# Altium PCB BAILEY.PcbDoc (part 7 of 8)
Units mil, origin at the board's own origin, x right, y up, seen from the top; angles counter-clockwise.
Board outline 6100 x 3000 mil, 4 copper layers (Signal Layer 1, Signal Layer 2, Signal Layer 3, Signal Layer 4), stack 59.904 mil thick; 167 components, 96 nets, 718 pads, 2907 vias.
Unrouted connection lines stored in the file: 1.
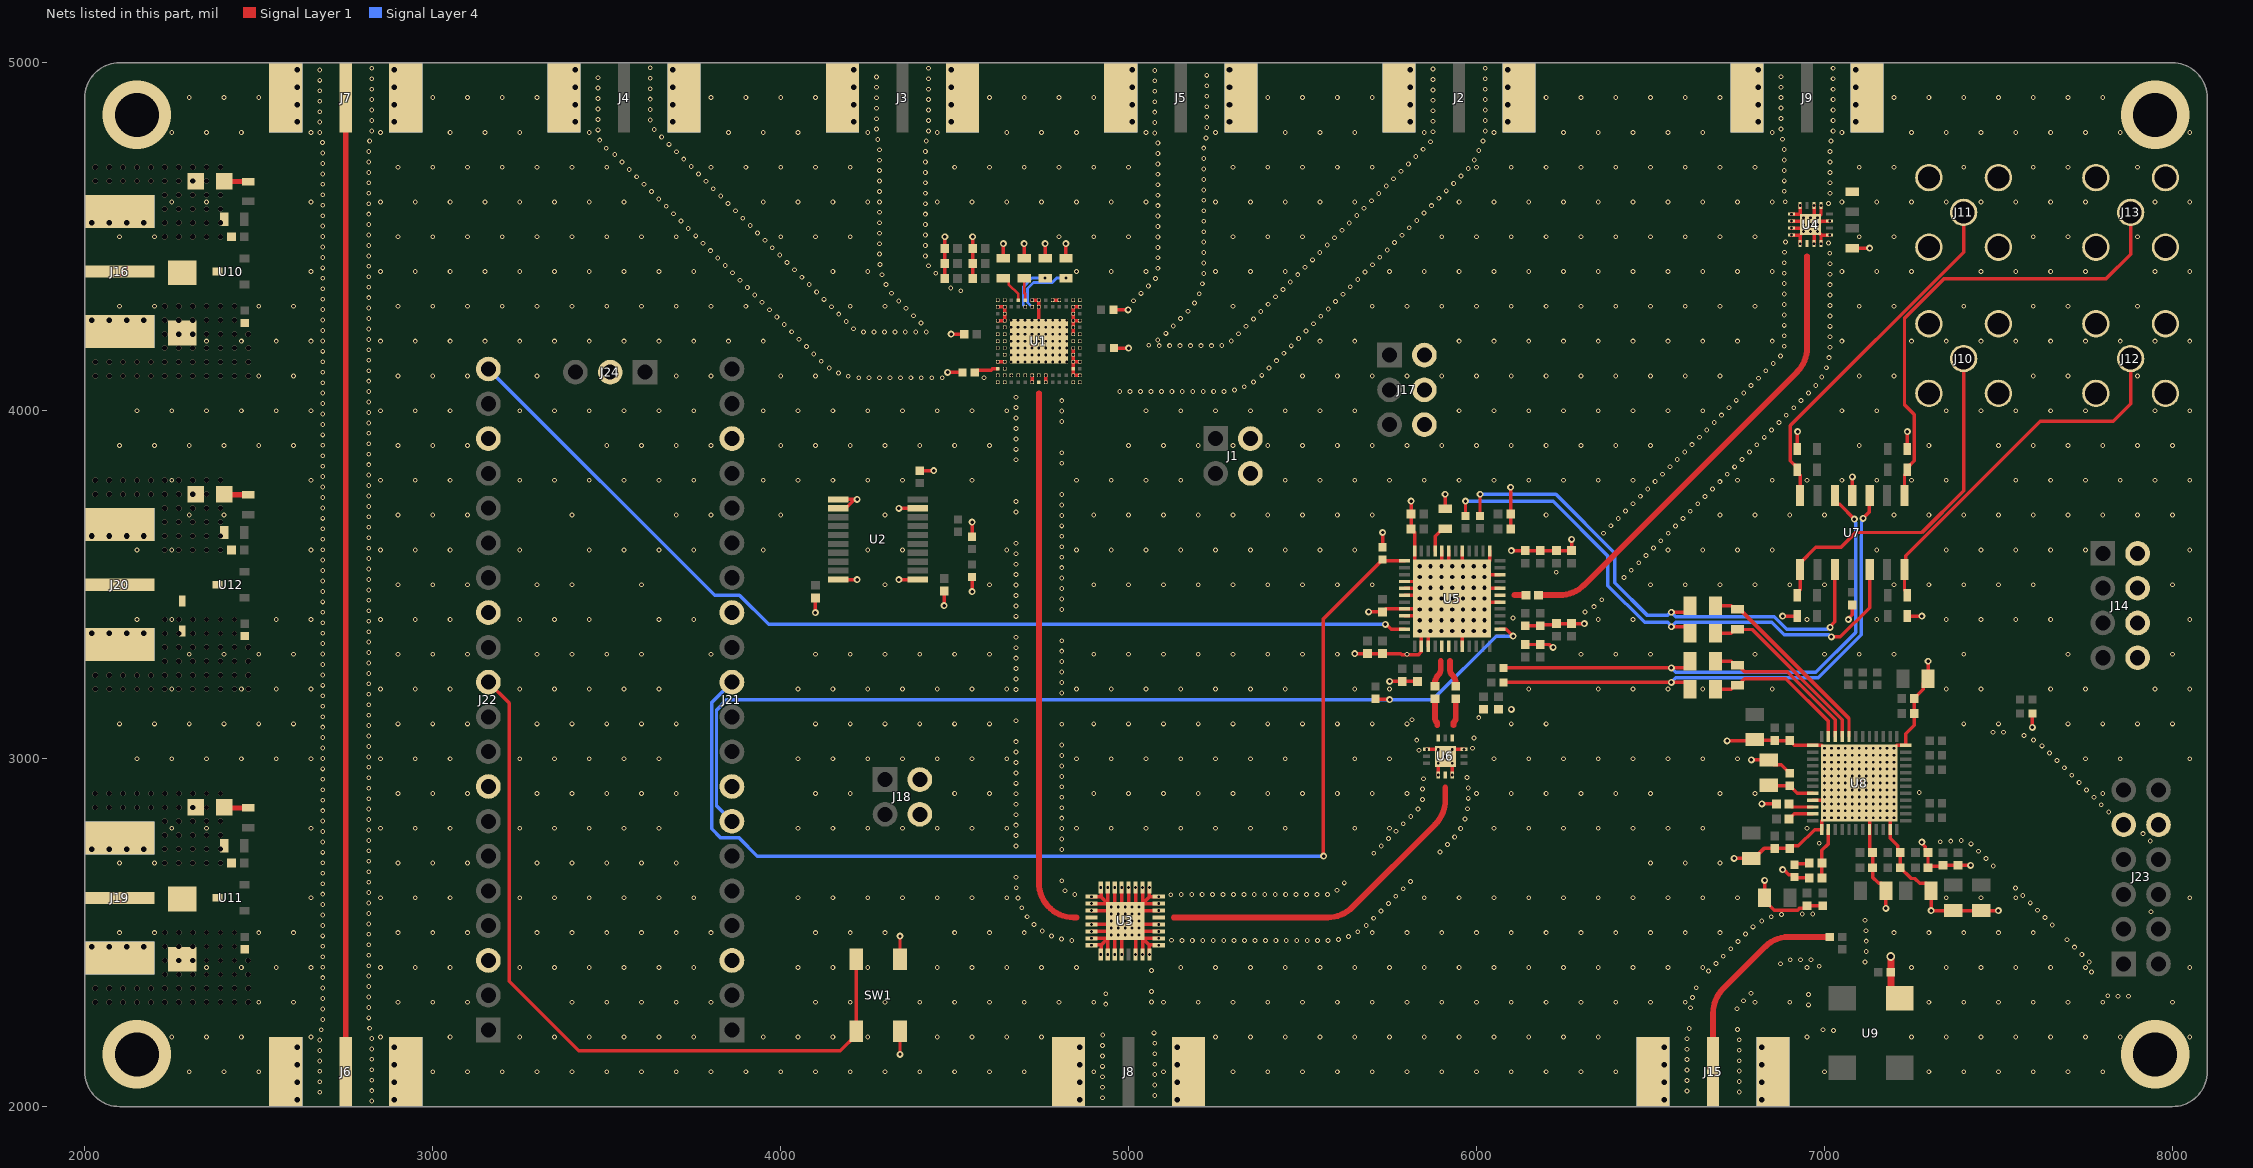
[diagram p5: the nets of this part, all layers, seen from the top]

## Via types
v1: diameter 13.78, hole 7.87, Signal Layer 1 to Signal Layer 4, tented both sides, 1913 vias
v2: diameter 15, hole 15, Signal Layer 1 to Signal Layer 4, 378 vias
v3: diameter 7.87, hole 7.87, Signal Layer 1 to Signal Layer 4, 335 vias
v4: diameter 20, hole 10, Signal Layer 1 to Signal Layer 4, 130 vias
v5: diameter 16, hole 16, Signal Layer 1 to Signal Layer 4, 96 vias
v6: diameter 12, hole 12, Signal Layer 1 to Signal Layer 4, 49 vias
v7: diameter 196.85, hole 125.98, Signal Layer 1 to Signal Layer 4, 4 vias
v8: diameter 25, hole 15, Signal Layer 1 to Signal Layer 4, 2 vias

## Nets (pads, with @x,y where several pads share a name; then routed paths per layer and width w, separated by ;. In a path a pad name is that pad's centre, name@x,y a point inside that pad or via, vN(x,y) a via of type N, cw(c..) or ccw(c..) an arc to the next point about the centre after c; other vN are vias at no path point) (continued)
GND: C1.1 C2.1 C3.1 C4.1 C5.2 C6.1 C7.2 C8.2 C9.1 C10.2 C11.1 C12.2 C13.1 C14.1 C15.1 C16.2 C18.1 C19.2 C20.1 C21.1 C22.2 C25.1 C26.1 C27.2 C28.1 C29.2 C30.1 C31.2 C32.1 C33.2 C34.1 C35.2 C36.1 C37.2 C38.1 C39.2 C40.1 C41.1 C42.1 C43.1 C44.1 C45.1 C46.1 C47.1 C48.1 C49.1 C50.1 C52.1 C53.1 C54.1 C55.1 C56.1 C57.1 C58.1 C59.1 C60.1 C61.1 C62.1 C63.1 C64.1 C65.1 C66.1 C68.1 C69.1 C70.1 C77.1 C78.1 C79.1 C80.1 C81.1 C82.1 C83.1 D1.2 D2.2 D3.1 D4.1 D5.1 D6.2 J1.3 J1.4 J2.2 J3.2 J4.2 J5.2 J6.2 J7.2 J8.2 J9.2 J10.2 J11.2 J12.2 J13.2 J14.5 J14.6 J14.7 J14.8 J15.2 J16.2 J17.4 J17.5 J17.6 J18.3 J18.4 J19.2 J20.2 J21.3 J21.8 J21.13 J21.18 J22.3 J22.8 J22.13 J22.18 J23.5 J23.11 J24.2 R1.1 R2.1 R3.1 R4.1 R5.1 R6.1 R8.2 R9.2 R17.2 R18.2 R19.2 R20.2 R31.2 R33.1 R36.1 R37.1 R41.1 SW1.3 SW1.4 U1.89 U1.A1 U1.A2 U1.A6 U1.A8 U1.A12 U1.A13 U1.B1 U1.B2 U1.B6 U1.B7 U1.B8 U1.B9 U1.B10 U1.B11 U1.B12 U1.B13 U1.C2 U1.C12 U1.D1 U1.D2 U1.D12 U1.D13 U1.E2 U1.E12 U1.F1 U1.F2 U1.F12 U1.F13 U1.G1 U1.G2 U1.G12 U1.G13 U1.H1 U1.H2 U1.H12 U1.H13 U1.J2 U1.J12 U1.K1 U1.K2 U1.K12 U1.K13 U1.L2 U1.L12 U1.M1 U1.M2 U1.M7 U1.M12 U1.M13 U1.N1 U1.N2 U1.N4 U1.N5 U1.N7 U1.N8 U1.N12 U1.N13 U2.1 U2.9 U2.11 U2.12 U2.20 U3.1 U3.2 U3.3 U3.4 U3.5 U3.6 U3.7 U3.8 U3.9 U3.10 U3.11 U3.13 U3.14 U3.15 U3.16 U3.17 U3.18 U3.19 U3.20 U3.22 U3.23 U3.24 U3.25 U3.26 U3.27 U3.28 U3.30 U3.31 U3.32 U3.33 U4.1 U4.2 U4.4 U4.5 U4.6 U4.7 U4.8 U4.9 U4.11 U4.12 U4.13 U4.15 U4.17 U5.4 U5.5 U5.6 U5.8 U5.9 U5.14 U5.15 U5.20 U5.30 U5.32 U5.34 U5.37 U5.41 U5.43 U5.44 U5.48 U5.49 U6.1 U6.3 U6.6 U6.10 U6.13 U7.11 U8.1 U8.9 U8.13 U8.20 U8.23 U8.36 U8.49 U9.2 | length 9684.2
  Signal Layer 1 w10: v4(4100,3420) C12.2@4100,3461.89 ; U2.20@4165.83,3514.84 v4(4220,3514.84) ; U2.12@4165.83,3719.57 4186.5,3719.57 4210.17,3743.24 4218.09,3743.24 v4(4220,3745.16) ; U2.11@4165.83,3745.16 v4@4210.17,3745.16 ; v4(4340,3514.84) U2.1@4394.17,3514.84 ; v4(4340,3719.57) U2.9@4394.17,3719.57 ; v4(4342.99,2150) SW1.4@4342.99,2216.65 ; SW1.3@4342.99,2423.35 v4(4342.99,2490) ; R8.2@4400,3827.72 v4(4440,3827.72) ; v4(4470,3440) C11.1@4470,3481.89 ; C10.2@4471.89,4380 v4(4471.89,4500) ; v4(4480,4110) R1.1@4522.28,4110 ; v4(4490,4220) R4.1@4527.87,4220 ; v4(4550,3480) R5.1@4550,3522.28 ; R6.1@4550,3637.72 v4(4550,3680) ; C7.2@4551.89,4380 v4(4551.89,4500) ; v3(4624.02,4140.94) v3(4643.7,4140.94) ; v3(4624.02,4259.06) v3(4643.7,4259.06) v3(4643.7,4278.74) v3(4643.7,4298.43) v3(4624.02,4298.43) ; C1.1@4640,4438.74 v4(4640,4480) ; C2.1@4700,4438.74 v4(4700,4480) ; v3(4722.44,4081.89) v3(4722.44,4101.57) ; v3(4722.44,4318.11) v3(4742.13,4318.11) v3(4742.13,4298.43) v3(4742.13,4260) ; C3.1@4760,4438.74 v4(4760,4480) ; v3(4761.81,4081.89) v3(4761.81,4101.57) ; v3(4781.5,4318.11) v3(4801.18,4318.11) ; C4.1@4820,4438.74 v4(4820,4480) ; v3(4840.55,4180.31) v3(4840.55,4160.63) v3(4840.55,4140.94) ; v3(4840.55,4219.69) v3(4840.55,4239.37) v3(4840.55,4259.06) ; v3(4860.24,4101.57) v3(4840.55,4101.57) U1.C2@4840.55,4121.26 v3(4840.55,4140.94) ; v3(4860.24,4140.94) v3(4840.55,4140.94) ; v3(4860.24,4259.06) v3(4840.55,4259.06) ; v3(4860.24,4298.43) v3(4840.55,4298.43) v3(4840.55,4278.74) v3(4840.55,4259.06) ; v3(4893.5,2463.5) 4894.5,2464.5 4921,2464.5 ; v3(4893.5,2483.5) U3.33@4940,2483.5 ; v3(4893.5,2503.5) U3.33@4959.99,2503.5 ; v3(4893.5,2523.5) U3.33@4979.99,2523.5 ; v3(4893.5,2563.5) 4960,2563.5 v3(4960,2630) ; v3(4893.5,2583.5) U3.33@4940,2583.5 ; v3(4893.5,2603.5) 4894.5,2602.5 4921,2602.5 ; v3(4920,2437) 4921,2438 4921,2464.5 ; v3(4920,2630) 4921,2629 4921,2602.5 ; v3(4940,2437) U3.33@4940,2483.5 ; v3(4940,2630) U3.33@4940,2583.5 ; R2.1@4956.38,4290 v4(4998.66,4290) ; R3.1@4957.72,4180 v4(5000,4180) ; v3(4960,2437) U3.33@4960,2503.51 ; v3(4980,2437) U3.33@4980,2523.51 ; v3(4980,2630) 4980,2543.5 v3(4990,2533.5) U3.33@4980,2523.51 ; U3.33@5000,2523.5 v3(5086.5,2523.5) ; U3.33@5000,2543.51 v3(5000,2630) ; v3(5020,2437) 5020,2503.5 v3(5086.5,2503.5) ; v3(5020,2630) 5020,2563.51 v3(5086.5,2563.5) ; v3(5040,2437) U3.33@5040,2483.5 ; v3(5040,2630) U3.33@5040,2583.5 ; v3(5060,2437) 5059,2438 5059,2464.5 ; v3(5060,2630) 5059,2629 5059,2602.5 ; v3(5086.5,2463.5) 5085.5,2464.5 5059,2464.5 ; v3(5086.5,2483.5) U3.33@5040,2483.5 ; v3(5086.5,2583.5) U3.33@5040,2583.5 ; v3(5086.5,2603.5) 5085.5,2602.5 5059,2602.5 ; v4(5650,3301.89) C19.2@5686.8,3301.89 C18.1@5730,3301.89 5782.08,3301.89 5785.97,3298 5832.42,3298 5841.42,3307 U5.14@5841.42,3323 U5.49@5841.42,3367 ; v4(5690,3421.89) C20.1@5730,3421.89 5738.58,3430.47 U5.8@5793,3430.47 U5.49@5837,3430.47 ; R9.2@5730,3607.72 v4(5730,3650) ; v4(5750,3221.89) C29.2@5786.8,3221.89 C28.1@5830,3221.89 ; U5.9@5793,3410.79 U5.49@5880.79,3410.79 ; U5.6@5793,3469.84 5920.16,3469.84 U5.43@5920.16,3597 ; U5.5@5793,3489.53 U5.49@5837,3489.53 ; U5.4@5793,3509.21 U5.49@5880.79,3509.21 ; v4(5811.89,3740) C31.2@5811.89,3703.2 C30.1@5811.89,3660 5821.73,3650.16 U5.48@5821.73,3597 5821.73,3568.27 v6(5837,3553) ; v3(5856.81,3026.5) v3(5890.31,3026.5) v3(5910.31,3006.5) ; U5.15@5861.1,3323 U5.49@5861.1,3391.1 ; v3(5890.31,2953) v3(5890.31,2986.5) ; U5.49@5900.47,3553 U5.44@5900.47,3597 ; C25.1@5910,3718.74 v4(5910,3760) ; v6(5930,3460) 6038.27,3568.27 U5.37@6038.27,3597 ; v3(5930.31,2953) v3(5930.31,2986.5) ; v3(5930.31,3026.5) v3(5963.81,3026.5) ; U5.49@5939.84,3450.16 U5.30@6067,3450.16 ; U5.20@5959.53,3323 U5.49@5959.53,3367 ; U5.49@5959.53,3553 U5.41@5959.53,3597 ; U5.49@5998.9,3528.9 U5.34@6067,3528.9 ; U5.49@6023,3489.53 U5.32@6067,3489.53 ; C36.1@6098.11,3660 C37.2@6098.11,3703.2 v4(6098.11,3780.03) ; v4(6100,3598.11) C21.1@6140,3598.11 C22.2@6183.2,3598.11 C34.1@6230,3598.11 C35.2@6273.2,3598.11 v4(6273.2,3630) ; C39.2@6140,3328.11 C38.1@6183.2,3328.11 6209.52,3328.11 6217.63,3320 v4(6220,3320) ; C32.1@6140,3381.89 C33.2@6183.2,3381.89 6186.31,3385 6226.89,3385 C26.1@6230,3388.11 C27.2@6273.2,3388.11 v4(6310,3388.11) ; v4(6720,3051) 6800.43,3051 6801.85,3052.42 C42.1@6856.8,3052.42 6857.07,3052.16 6899.73,3052.16 C43.1@6900,3051.89 6913.62,3038.27 U8.1@6966.24,3038.27 6966.34,3038.17 6991.83,3038.17 v3(7000,3030) ; v4(6740,2713.58) C44.1@6790,2713.58 6797.87,2713.58 6826.18,2741.89 C45.1@6856.8,2741.89 C46.1@6900,2741.89 6907.6,2749.49 6924.88,2749.49 6971.64,2796.24 U8.13@6991.73,2796.24 6991.83,2796.34 6991.83,2821.83 v3(7000,2830) ; v4(6790,2996.42) C59.1@6840,2996.42 6853.7,2982.72 6875.39,2982.72 C61.1@6900,2958.11 ; v4(6820,2870) C50.1@6861.89,2870 ; v4(6827.87,2650) C66.1@6827.87,2600.32 6827.87,2592.45 6855.57,2564.75 6923.13,2564.75 6928.17,2569.79 6942.4,2569.79 C68.1@6950,2577.39 C69.1@6995.08,2577.39 ; v4(6879.8,2681.38) 6882.5,2681.38 6897.15,2666.73 6907.16,2666.73 R33.1@6913.97,2659.92 6915.53,2658.36 6954.82,2658.36 C70.1@6956.38,2656.8 ; v4(6880,3410) R17.2@6921.46,3410 ; v3(6905,4505) U4.17@6930,4505 ; v3(6905,4525) 6950,4525 v3(6960,4535) ; v3(6905,4545) U4.17@6950,4545 ; v3(6905,4565) U4.17@6930,4565 ; R18.2@6921.46,3890 6922.23,3890.77 6922.23,3939.23 v4(6923,3940) ; v3(6930,4480) U4.17@6930,4505 ; v3(6930,4590) U4.17@6930,4565 ; v3(6940,4515) U4.17@6930,4505 ; v3(6940,4555) U4.17@6930,4565 ; U8.9@6966.24,2880.79 7050.79,2880.79 v3(7060,2890) v3(7080,2910) v3(7100,2930) ; v3(6970,4480) 6970,4525 v3(6960,4535) ; v3(6970,4590) 6970,4545 v3(6960,4535) ; v3(6980,4515) U4.17@6990,4505 ; U4.17@6980,4540 6986.21,4540 6990.71,4544.5 7014.5,4544.5 v3(7015,4545) ; v3(6980,4555) 6990,4565 v3(6990,4590) ; v3(6990,4480) U4.17@6990,4505 ; v3(7015,4505) U4.17@6990,4505 ; v4(7068.91,3400) 7068.91,3402.71 7080,3413.8 C40.1@7080,3441.89 ; U7.11@7080,3756.3 v4(7080,3810) ; C14.1@7080,4467.52 v4(7130,4467.52) ; U8.49@7129.53,2900.47 U8.20@7129.53,2796.24 7129.53,2738.58 C49.1@7138.11,2730 C48.1@7138.11,2686.8 7138.11,2659.2 7155.74,2641.57 7162.72,2641.57 7176.42,2627.87 C47.1@7176.42,2620 v4(7176.42,2570) ; v3(7180,2850) 7188.58,2841.42 7188.58,2771.42 7210.51,2749.49 7210.51,2737.6 C54.1@7218.11,2730 C53.1@7218.11,2686.8 ; v3(7200,3030) 7208.17,3038.17 7233.66,3038.17 U8.36@7233.76,3038.27 7233.76,3072 7258.11,3096.36 C65.1@7258.11,3130 C64.1@7258.11,3173.2 7284.33,3199.42 7284.33,3216.67 C63.1@7298.03,3230.37 v4(7298.03,3280) ; C53.1@7218.35,2686.57 7249.34,2655.57 7260.02,2655.57 7274.02,2641.57 7292.72,2641.57 C52.1@7306.42,2627.87 ; R19.2@7238.54,3410 v4(7280,3410) ; R20.2@7238.54,3890 v4(7238.54,3940) ; v4(7280,2760) 7280,2757.29 7289.93,2747.37 7289.93,2737.6 C57.1@7297.53,2730 C56.1@7297.53,2686.8 7300.91,2690.18 7337.34,2690.18 C62.1@7340.72,2693.56 C60.1@7383.92,2693.56 v4(7420,2693.56) ; C52.1@7306.42,2620 7310.35,2620 7306.42,2616.06 v4(7306.42,2563.58) C55.1@7370,2563.58 C58.1@7450,2563.58 v4(7500,2563.58) ; v4(7597.72,3089.94) R31.2@7597.72,3130 ; 4921,2464.5 U3.33@4940,2483.5 ; 4921,2602.5 U3.33@4940,2583.5 ; U3.33@4940,2483.51 v3(4950,2493.5) U3.33@4959.99,2503.5 ; U3.33@4960,2503.51 v3(4970,2513.5) U3.33@4979.99,2523.5 ; U3.33@5040,2483.5 5059,2464.5 ; U3.33@5040,2583.5 5059,2602.5
  Signal Layer 1 w20: v8(7190.62,2431.42) C77.1@7190.62,2386.09 7190.62,2336.86 U9.2@7216.14,2311.42 U9.2@7216.14,2311.42
  other v1: 2824.88,2015.86 4925.12,2025.65 5074.88,2031.95 2675.12,2041.36 6754.88,2042.01 6605.12,2045.13 2824.88,2045.86 4925.12,2055.65 5074.88,2061.95 2675.12,2071.36 6754.88,2072.01 6605.12,2075.13 2824.88,2075.86 4925.12,2085.65 5074.88,2091.95 2300,2100 2400,2100 2500,2100 3000,2100 3100,2100 3200,2100 3300,2100 3400,2100 3500,2100 3600,2100 3700,2100 3800,2100 3900,2100 4000,2100 4100,2100 4200,2100 4300,2100 4400,2100 4500,2100 4600,2100 4700,2100 4900,2100 5100,2100 5300,2100 5400,2100 5500,2100 5600,2100 5700,2100 5800,2100 5900,2100 6000,2100 6100,2100 6200,2100 6300,2100 6400,2100 7000,2100 7300,2100 7400,2100 7500,2100 7600,2100 7700,2100 7800,2100 2675.12,2101.36 6754.88,2102.01 6605.12,2105.13 2824.88,2105.86 4925.12,2115.65 5074.88,2121.95 2675.12,2131.36 6754.88,2132.01 6605.12,2135.13 2824.88,2135.86 4925.12,2145.65 5074.88,2151.95 2675.12,2161.36 6754.88,2162.01 6605.12,2165.13 2824.88,2165.86 4925.12,2175.65 5074.88,2181.95 2675.12,2191.36 6754.88,2192.01 6605.12,2195.13 2824.88,2195.86 2250,2200 2350,2200 2450,2200 2650,2200 2850,2200 3050,2200 3250,2200 3350,2200 3450,2200 3550,2200 3650,2200 3750,2200 3950,2200 4050,2200 4150,2200 4250,2200 4450,2200 4550,2200 4650,2200 4750,2200 5250,2200 5350,2200 5450,2200 5550,2200 5650,2200 5750,2200 5850,2200 5950,2200 6050,2200 6150,2200 6250,2200 6350,2200 6950,2200 7250,2200 7350,2200 7450,2200 7550,2200 7650,2200 7750,2200 7850,2200 8050,2200 4925.86,2205.64 5073.31,2211.91 7025.94,2218.61 2679.63,2221.02 6996.02,2220.79 6750.12,2221.63 2818.64,2225.2 6611.08,2224.53 2684.13,2250.68 2815.87,2255.08 2684.13,2280.68 6748.52,2281.21 6615.02,2284.36 2815.87,2285.08 6954.04,2292.41 4934.13,2294.47 2500,2300 2600,2300 2900,2300 3000,2300 3100,2300 3400,2300 3500,2300 3600,2300 3700,2300 3800,2300 4100,2300 4200,2300 4300,2300 4400,2300 4500,2300 4600,2300 4700,2300 4800,2300 4900,2300 5100,2300 5200,2300 5300,2300 5400,2300 5500,2300 5600,2300 5700,2300 5800,2300 5900,2300 6000,2300 6100,2300 6200,2300 6300,2300 6400,2300 6500,2300 6600,2300 6800,2300 6900,2300 7300,2300 7400,2300 7500,2300 7600,2300 7700,2300 7800,2300 8000,2300 5065.87,2300.97 6767.55,2304.4 2684.13,2310.68 6620.46,2313.86 2815.87,2315.07 7843.9,2317.19 7873.9,2317.19 7813.93,2318.59 6954.04,2322.41 4934.13,2324.47 6788.76,2325.61 5065.87,2330.97 2684.13,2340.68 6631.3,2341.83 2815.87,2345.07 2684.13,2370.68 2815.87,2375.07 7767.19,2386.55 6666.79,2389.94 5065.87,2390.97 2350,2400 2450,2400 2550,2400 2650,2400 2850,2400 2950,2400 3050,2400 3250,2400 3350,2400 3450,2400 3550,2400 3650,2400 3750,2400 4050,2400 4150,2400 4250,2400 4450,2400 4550,2400 4650,2400 4750,2400 4850,2400 5150,2400 5250,2400 5350,2400 5450,2400 5550,2400 5650,2400 5750,2400 5850,2400 5950,2400 6050,2400 6150,2400 6250,2400 6350,2400 6450,2400 6550,2400 6650,2400 6950,2400 7250,2400 7350,2400 7450,2400 7550,2400 7650,2400 7750,2400 8050,2400 2684.13,2400.68 6984.92,2403.27 2815.87,2405.07 6873.61,2410.46 6688,2411.15 7116.66,2415.78 7760.95,2415.89 6901.37,2421.85 6931.37,2421.85 6961.37,2421.85 2684.13,2430.68 6709.21,2432.36 2815.87,2435.07 7739.74,2437.11 7119.98,2445.59 6730.43,2453.58 7718.53,2458.32 2684.13,2460.68 2815.87,2465.07 6751.64,2474.79 7119.94,2475.59 4836.56,2477.72 5123.23,2478.17 5153.23,2477.63 5183.22,2477.63 5213.22,2477.63 5243.22,2477.63 5273.22,2477.63 5303.22,2477.63 5333.22,2477.63 5363.22,2477.63 5393.22,2477.63 5423.22,2477.63 5453.22,2477.63 5483.22,2477.63 5513.22,2477.63 5543.22,2477.63 5573.22,2477.61 7697.31,2479.53 5603.08,2480.53 4806.81,2481.56 5631.88,2488.91 2684.13,2490.68 4778.21,2490.62 2815.87,2495.07 6772.85,2496 2100,2500 2200,2500 2500,2500 2600,2500 2900,2500 3000,2500 3100,2500 3300,2500 3400,2500 3500,2500 3600,2500 3700,2500 3800,2500 4100,2500 4200,2500 4300,2500 4500,2500 4600,2500 4700,2500 5700,2500 5800,2500 5900,2500 6000,2500 6100,2500 6200,2500 6300,2500 6400,2500 6500,2500 6600,2500 6700,2500 7200,2500 7300,2500 7400,2500 7500,2500 7600,2500 5658.74,2502.26 4751.66,2504.59 7119.18,2505.58 6794.67,2516.59 5682.82,2520.16 2684.13,2520.68 7654.89,2521.96 4728.01,2523.05 2815.87,2525.07 6819.46,2533.49 7116.66,2535.47 5704.28,2541.13 7633.68,2543.17 6846.96,2545.48 4708.39,2545.74 2684.13,2550.67 6876.2,2552.16 6936.17,2553.59 6966.17,2553.59 2815.87,2555.07 7938.2,2560.19 5725.49,2562.34 7612.46,2564.38 4692.79,2571.36 2684.13,2580.67 5746.7,2583.55 2815.87,2585.07 7591.25,2585.6 4682.28,2599.46 2650,2600 2850,2600 2950,2600 3050,2600 3250,2600 3350,2600 3450,2600 3550,2600 3650,2600 3750,2600 4050,2600 4150,2600 4250,2600 4350,2600 4450,2600 4550,2600 4650,2600 5850,2600 5950,2600 6050,2600 6150,2600 6250,2600 6350,2600 6450,2600 6550,2600 6650,2600 6750,2600 7350,2600 7450,2600 7550,2600 8050,2600 5767.92,2604.76 7570.04,2606.81 4845.1,2609.37 5121.36,2608.66 5151.35,2609.37 5181.35,2609.37 5211.35,2609.37 5241.35,2609.37 5271.35,2609.37 5301.35,2609.37 5331.35,2609.37 5361.35,2609.37 5391.35,2609.37 5421.35,2609.37 5451.35,2609.37 5481.35,2609.37 5511.35,2609.37 5541.35,2609.37 5571.35,2609.47 2684.13,2610.67 2815.87,2615.07 4817.25,2620.54 5598.68,2621.83 5789.13,2625.98 7548.82,2628.02 4677.05,2629 2684.13,2640.67 5619.89,2643.04 2815.87,2645.07 5810.34,2647.19 4807.99,2649.07 4676.26,2658.99 2684.13,2670.67 2815.87,2675.07 7485.19,2691.66 2100,2700 2200,2700 2900,2700 3000,2700 3100,2700 3300,2700 3400,2700 3500,2700 3600,2700 3700,2700 6500,2700 6600,2700 6700,2700 2684.13,2700.67 2815.87,2705.07 7463.97,2712.87 5704.74,2727.9 2684.13,2730.67 5895.19,2732.04 7442.76,2734.09 2815.87,2735.07 4807.99,2739.07 4676.26,2748.99 5725.96,2749.11 5916.41,2753.26 7421.36,2755.11 6985.1,2757 2684.13,2760.67 7332.98,2761.26 7362.93,2763.02 7936.26,2763.08 2815.87,2765.07 7392.89,2764.58 4807.99,2769.07 5747.17,2770.32 5937.07,2775 4676.26,2778.99 7915.3,2784.55 2684.13,2790.67 5768.38,2791.53 2815.87,2795.07 4807.99,2799.07 2250,2800 2350,2800 2650,2800 2850,2800 2950,2800 3050,2800 3250,2800 3350,2800 3450,2800 3550,2800 3650,2800 4050,2800 4150,2800 4250,2800 4350,2800 4450,2800 4550,2800 4650,2800 4850,2800 4950,2800 5050,2800 5150,2800 5250,2800 5350,2800 5450,2800 5650,2800 5750,2800 5954.3,2799.56 6050,2800 6150,2800 6250,2800 6350,2800 6450,2800 6550,2800 6650,2800 6950,2800 4676.26,2808.99 5789.59,2812.75 2684.13,2820.67 2815.87,2825.07 5966.83,2826.82 4807.99,2829.07 5810.81,2833.96 4676.26,2838.99 7816.74,2846.41 2684.13,2850.67 2815.87,2855.07 5832.02,2855.17 5973.93,2855.96 4807.99,2859.07 7795.52,2867.63 4676.26,2868.99 2684.13,2880.67 5844.35,2882.52 2815.87,2885.07 5976.18,2885.88 4807.99,2889.07 7774.31,2888.84 4676.26,2898.99 2900,2900 3000,2900 3100,2900 3300,2900 3400,2900 3500,2900 3600,2900 3700,2900 4100,2900 4200,2900 4500,2900 4600,2900 4900,2900 5000,2900 5100,2900 5200,2900 5300,2900 5400,2900 5500,2900 5600,2900 5700,2900 5800,2900 6000,2900 6100,2900 6200,2900 6300,2900 6400,2900 6500,2900 6700,2900 6800,2900 7800,2900 7272.19,2902.86 7753.1,2910.05 2684.13,2910.67 5844.45,2912.52 2815.87,2915.06 5976.18,2915.88 4807.99,2919.07 4676.26,2928.99 7731.89,2931.27 2684.13,2940.67 5847.39,2942.38 2815.87,2945.06 5972.82,2945.69 4807.99,2949.07 7710.67,2952.48 4676.26,2958.99 2684.13,2970.67 7689.46,2973.69 2815.87,2975.06 4807.99,2979.07 4676.26,2988.99 7668.25,2994.9 2150,3000 2250,3000 2350,3000 2450,3000 2550,3000 2650,3000 2850,3000 2950,3000 3050,3000 3250,3000 3350,3000 3450,3000 3550,3000 3650,3000 4050,3000 4150,3000 4250,3000 4350,3000 4450,3000 4550,3000 4650,3000 4850,3000 4950,3000 5050,3000 5150,3000 5250,3000 5350,3000 5450,3000 5650,3000 5750,3000 6050,3000 6150,3000 6250,3000 6350,3000 6450,3000 6550,3000 6650,3000 6750,3000 7750,3000 7850,3000 8050,3000 2684.13,3000.67 2815.87,3005.06 4807.99,3009.07 7647.03,3016.12 4676.26,3018.99 5834.5,3024.02 5988.57,3029.91 2684.13,3030.67 2815.87,3035.06 7625.28,3036.77 4807.99,3039.07 4676.26,3048.99 5827.93,3053.3 7600.7,3053.97 5992.7,3059.63 2684.13,3060.67 2815.87,3065.06 7573.41,3066.44 7484.35,3075.74 7514.35,3075.74 2684.13,3090.67 2815.87,3095.06 4807.99,3099.06 2100,3100 2200,3100 2300,3100 2400,3100 2500,3100 2600,3100 2900,3100 3000,3100 3100,3100 3300,3100 3400,3100 3500,3100 3600,3100 3700,3100 4100,3100 4200,3100 4300,3100 4400,3100 4500,3100 4600,3100 4900,3100 5000,3100 5100,3100 5200,3100 5300,3100 5400,3100 5500,3100 5600,3100 5700,3100 5800,3100 6100,3100 6200,3100 7400,3100 7500,3100 7700,3100 7800,3100 7900,3100 8000,3100 4676.26,3108.98 5814.82,3111.84 6006.41,3117.94 2684.13,3120.67 2815.87,3125.06 2684.13,3150.66 2815.87,3155.06 2684.13,3180.66 2815.87,3185.06 4807.99,3189.06 4676.26,3198.98 2250,3200 2450,3200 2550,3200 2650,3200 2850,3200 2950,3200 3050,3200 3250,3200 3350,3200 3450,3200 3550,3200 3650,3200 4050,3200 4150,3200 4250,3200 4350,3200 4450,3200 4550,3200 4650,3200 4850,3200 4950,3200 5050,3200 5150,3200 5250,3200 5350,3200 5450,3200 5650,3200 5750,3200 6150,3200 6350,3200 6450,3200 6550,3200 6650,3200 6850,3200 7350,3200 7450,3200 7650,3200 7750,3200 7950,3200 8050,3200 2684.13,3210.66 2815.87,3215.06 4807.99,3219.06 4676.26,3228.98 2684.13,3240.66 2815.87,3245.06 4807.99,3249.06 4676.26,3258.98 2684.13,3270.66 2815.87,3275.06 4807.99,3279.06 4676.26,3288.98 2300,3300 2400,3300 2500,3300 2600,3300 2900,3300 3000,3300 3100,3300 3300,3300 3400,3300 3500,3300 3600,3300 3800,3300 4100,3300 4200,3300 4300,3300 4400,3300 4500,3300 4600,3300 4900,3300 5000,3300 5100,3300 5200,3300 5300,3300 5400,3300 5500,3300 5600,3300 5800,3300 6300,3300 6400,3300 6500,3300 6800,3300 7000,3300 7100,3300 7200,3300 7400,3300 7700,3300 8000,3300 2684.13,3300.66 2815.87,3305.06 4807.99,3309.06 4676.26,3318.98 2684.13,3330.66 2815.87,3335.06 4807.99,3339.06 4676.26,3348.98 2684.13,3360.66 2815.87,3365.06 2684.13,3390.66 2815.87,3395.06 2150,3400 2250,3400 2550,3400 2650,3400 2850,3400 2950,3400 3050,3400 3250,3400 3350,3400 3450,3400 3650,3400 3750,3400 6350,3400 6450,3400 6950,3400 7150,3400 7350,3400 7450,3400 7550,3400 7650,3400 8050,3400 6104.89,3404.17 4676.26,3408.98 2684.13,3420.66 6311.84,3421.31 2815.87,3425.06 4807.99,3429.06 6337.42,3436.97 4676.26,3438.98 2684.13,3450.66 2815.87,3455.06 6359.94,3456.79 4807.99,3459.06 4676.26,3468.98 2684.13,3480.66 2815.87,3485.06 4807.99,3489.06 4676.26,3498.98 2900,3500 3000,3500 3100,3500 3300,3500 3400,3500 3600,3500 4300,3500 4600,3500 4900,3500 5000,3500 5100,3500 5200,3500 5300,3500 5400,3500 5500,3500 5600,3500 5700,3500 6500,3500 6600,3500 6700,3500 6800,3500 6900,3500 7000,3500 7200,3500 7300,3500 7400,3500 7500,3500 7600,3500 8000,3500 2684.13,3510.66 2815.87,3515.05 4807.99,3519.06 6423.58,3520.43 4676.26,3528.98 6228.98,3535.87 2684.13,3540.66 6444.8,3541.64 2815.87,3545.05 4807.99,3549.06 4676.26,3558.98 6466.01,3562.86 2684.13,3570.66 2815.87,3575.05 4807.99,3579.06 6487.22,3584.07 4676.26,3588.98 2150,3600 2250,3600 2650,3600 2850,3600 2950,3600 3050,3600 3250,3600 3450,3600 3550,3600 3650,3600 3750,3600 3950,3600 4250,3600 4350,3600 4650,3600 4850,3600 4950,3600 5050,3600 5150,3600 5250,3600 5350,3600 5450,3600 5550,3600 5650,3600 6550,3600 6650,3600 6750,3600 6850,3600 7150,3600 7350,3600 7450,3600 7550,3600 7650,3600 7750,3600 8050,3600 2684.13,3600.66 2815.87,3605.05 6508.43,3605.28 4807.99,3609.06 4676.26,3618.98 6529.65,3626.49 2684.13,3630.66 2815.87,3635.05 4807.99,3639.05 6364.82,3647.98 6550.86,3647.71 2684.13,3660.66 2815.87,3665.05 4807.99,3669.05 6386.04,3669.19 6572.07,3668.92 6407.25,3690.4 6593.29,3690.13 2684.13,3690.66 2815.87,3695.05 4807.99,3699.05 2300,3700 2400,3700 2900,3700 3000,3700 3100,3700 3400,3700 3700,3700 3800,3700 4000,3700 4300,3700 4900,3700 5000,3700 5100,3700 5200,3700 5300,3700 5400,3700 5500,3700 5600,3700 5700,3700 6200,3700 6700,3700 6800,3700 6900,3700 7000,3700 7200,3700 7300,3700 7400,3700 7500,3700 7600,3700 7700,3700 7800,3700 7900,3700 8000,3700 4676.26,3708.97 6614.5,3711.35 6428.46,3711.61 2684.13,3720.66 2815.87,3725.05 4807.99,3729.05 6449.67,3732.83 6635.71,3732.56 4676.26,3738.97 2684.13,3750.65 6470.89,3754.04 6656.92,3753.77 2815.87,3755.05 4807.99,3759.05 6492.1,3775.25 6678.14,3774.99 2684.13,3780.65 2815.87,3785.05 6513.31,3796.46 6699.35,3796.2 2250,3800 2650,3800 2850,3800 2950,3800 3050,3800 3250,3800 3350,3800 3450,3800 3550,3800 3650,3800 3750,3800 3950,3800 4050,3800 4150,3800 4250,3800 4350,3800 4550,3800 4850,3800 4950,3800 5050,3800 5150,3800 5450,3800 5550,3800 5650,3800 5750,3800 5850,3800 5950,3800 6050,3800 6150,3800 6250,3800 6350,3800 6450,3800 6750,3800 6850,3800 6950,3800 7050,3800 7150,3800 7250,3800 7350,3800 7550,3800 7650,3800 7750,3800 7850,3800 7950,3800 8050,3800 2684.13,3810.65 2815.87,3815.05 6720.56,3817.41 6534.53,3817.68 6555.74,3838.89 6741.78,3838.62 2684.13,3840.65 2815.87,3845.05 4807.99,3849.05 4676.26,3858.97 6576.95,3860.1 6762.99,3859.84 2684.13,3870.65 2815.87,3875.05 4807.99,3879.05 6598.16,3881.32 6784.2,3881.05 4676.26,3888.97 2100,3900 2200,3900 2300,3900 2400,3900 2500,3900 2600,3900 2900,3900 3000,3900 3100,3900 3500,3900 3600,3900 3700,3900 3800,3900 4000,3900 4100,3900 4200,3900 4300,3900 4400,3900 4500,3900 4600,3900 5000,3900 5100,3900 5200,3900 5300,3900 5400,3900 5500,3900 5600,3900 5700,3900 5800,3900 5900,3900 6000,3900 6100,3900 6200,3900 6300,3900 6400,3900 6500,3900 7100,3900 7300,3900 7500,3900 7600,3900 7700,3900 7800,3900 7900,3900 8000,3900 2684.13,3900.65 6805.42,3902.26 6619.38,3902.53 2815.87,3905.05 4676.26,3918.97 6826.63,3923.48 6640.59,3923.74 2684.13,3930.65 2815.87,3935.05 6661.8,3944.95 6847.84,3944.69 4676.26,3948.97 2684.13,3960.65 2815.87,3965.05 6683.01,3966.17 6869.05,3965.9 4807.99,3969.05 4676.26,3978.97 6704.23,3987.38 6890.27,3987.11 2684.13,3990.65 2815.87,3995.05 4807.99,3999.05 2150,4000 2250,4000 2350,4000 2450,4000 2550,4000 2650,4000 2850,4000 2950,4000 3050,4000 3250,4000 3350,4000 3450,4000 3550,4000 3650,4000 3750,4000 3950,4000 4050,4000 4150,4000 4250,4000 4350,4000 4450,4000 4550,4000 4650,4000 5050,4000 5150,4000 5250,4000 5350,4000 5450,4000 5550,4000 5650,4000 5950,4000 6050,4000 6150,4000 6250,4000 6350,4000 6450,4000 6550,4000 6650,4000 7050,4000 7150,4000 7350,4000 7450,4000 7550,4000 7650,4000 7750,4000 7950,4000 8050,4000 6911.48,4008.33 4676.26,4008.97 6725.44,4008.59 2684.13,4020.65 2815.87,4025.05 4807.99,4029.05 6746.65,4029.81 6932.69,4029.54 4676.26,4038.97 2684.13,4050.65 6767.87,4051.02 6953.91,4050.75 2815.87,4055.05 4974.36,4055.39 5004.35,4055.39 5034.35,4055.39 5064.35,4055.39 5094.35,4055.39 5124.35,4055.39 5154.35,4055.39 5184.35,4055.39 5214.35,4055.39 5244.35,4055.39 5274.35,4055.56 5304.08,4059.58 5332.63,4068.79 6789.08,4072.23 6974.75,4072.33 2684.13,4080.65 5359.1,4082.92 2815.87,4085.05 6810.29,4093.44 4224.22,4095.05 4254.22,4094.76 4284.22,4094.76 4314.22,4094.76 4344.22,4094.76 4374.22,4094.76 4404.22,4094.76 4434.22,4094.76 4464.22,4094.76 4584.22,4094.76 6992.37,4096.61 4194.52,4099.28 2500,4100 2600,4100 2900,4100 3000,4100 3100,4100 3300,4100 3700,4100 3800,4100 4000,4100 4100,4100 5500,4100 5600,4100 5700,4100 5800,4100 5900,4100 6000,4100 6100,4100 6200,4100 6300,4100 6400,4100 6500,4100 6600,4100 6700,4100 7100,4100 7200,4100 7600,4100 7700,4100 7900,4100 5382.55,4101.62 4166.04,4108.71 2684.13,4110.65 2815.87,4115.04 6831.5,4114.66 4139.68,4123.03 5403.81,4122.78 7005.42,4123.62 6852.72,4135.87 2684.13,4140.65 4116.45,4142.01 5425.02,4144 2815.87,4145.04 7013.28,4152.57 6873.83,4157.18 4095.18,4163.17 5446.24,4165.21 2684.13,4170.65 2815.87,4175.04 7015.9,4182.46 4073.97,4184.38 6884.13,4185.36 5467.45,4186.42 5087.92,4187.13 5117.92,4187.13 5147.92,4187.13 5177.92,4187.13 5207.92,4187.13 5237.92,4187.13 5267.92,4187.32 5057.95,4188.39 2350,4200 2450,4200 2550,4200 2650,4200 2850,4200 2950,4200 3050,4200 3150,4200 3250,4200 3350,4200 3450,4200 3550,4200 3650,4200 3750,4200 3850,4200 3950,4200 5294.98,4200.26 5550,4200 5650,4200 5950,4200 6050,4200 6150,4200 6250,4200 6350,4200 6450,4200 6550,4200 6650,4200 6750,4200 6850,4200 7050,4200 7250,4200 7350,4200 7450,4200 7550,4200 7650,4200 7750,4200 7850,4200 7950,4200 8050,4200 2684.13,4200.65 5084.06,4203.16 2815.87,4205.04 4052.75,4205.59 5488.66,4207.64 7015.87,4212.46 6884.13,4215.36 5316.2,4221.47 5107.14,4222.33 4238.29,4226.5 4268.29,4226.5 4298.29,4226.5 4328.29,4226.5 4358.29,4226.5 4388.29,4226.5 4418.29,4226.5 4031.54,4226.8 5509.88,4228.85 2684.13,4230.65 2815.87,4235.04 4209.67,4235.48 7015.87,4242.46 5337.41,4242.69 5128.27,4243.62 6884.13,4245.36 4010.33,4248.02 5531.09,4250.06 4403.26,4252.46 4188.21,4256.44 2684.13,4260.65 5358.62,4263.9 2815.87,4265.04 5149.48,4264.83 3989.11,4269.23 5552.3,4271.27 7015.87,4272.46 4381.55,4273.17 6884.13,4275.36 4166.99,4277.65 5379.83,4285.11 5170.67,4286.07 3967.9,4290.44 2684.13,4290.65 5573.51,4292.49 4360.34,4294.38 2815.87,4295.04 4145.78,4298.87 2100,4300 2200,4300 2500,4300 2600,4300 2900,4300 3000,4300 3100,4300 3200,4300 3300,4300 3400,4300 3500,4300 3600,4300 3700,4300 3800,4300 3900,4300 4200,4300 4300,4300 5300,4300 5700,4300 5800,4300 5900,4300 6000,4300 6100,4300 6200,4300 6300,4300 6400,4300 6500,4300 6600,4300 6700,4300 6800,4300 7100,4300 7200,4300 7400,4300 7600,4300 7700,4300 7900,4300 7015.87,4302.46 6884.13,4305.36 5401.05,4306.33 5189.09,4309.75 3946.69,4311.65 5594.73,4313.7 4339.13,4315.6 5014.37,4316.11 4124.57,4320.08 2684.13,4320.65 2815.87,4325.04 5422.26,4327.54 7015.87,4332.46 3925.48,4332.87 5615.94,4334.91 6884.13,4335.36 5203.01,4336.32 5035.63,4337.28 4318.85,4337.7 4103.36,4341.29 4517.57,4344.61 5443.47,4348.75 2684.13,4350.64 4488.74,4352.92 3904.26,4354.08 2815.87,4355.04 5637.15,4356.13 5056.84,4358.5 7015.87,4362.45 4082.14,4362.51 4302.87,4363.1 5212.01,4364.94 6884.13,4365.36 5464.69,4369.96 3883.05,4375.29 5658.37,4377.34 5077.54,4380.21 2684.13,4380.64 4060.93,4383.72 2815.87,4385.04 4291.44,4390.83 5485.9,4391.18 7015.87,4392.45 4446,4395.03 5215.81,4394.7 6884.13,4395.36 3861.84,4396.51 5679.58,4398.55 2650,4400 2850,4400 2950,4400 3050,4400 3150,4400 3250,4400 3350,4400 3450,4400 3550,4400 3650,4400 3750,4400 4150,4400 4250,4400 4850,4400 4950,4400 5050,4400 5250,4400 5350,4400 5450,4400 5750,4400 5850,4400 5950,4400 6050,4400 6150,4400 6250,4400 6350,4400 6450,4400 6550,4400 6650,4400 6750,4400 6850,4400 7050,4400 7150,4400 7250,4400 7450,4400 7550,4400 7650,4400 7750,4400 7950,4400 8050,4400 4039.72,4404.93 5084.13,4409.48 2684.13,4410.64 5507.11,4412.39 2815.87,4415.04 4425.02,4416.47 3840.62,4417.72 4285.24,4420.18 5700.79,4419.77 7015.87,4422.45 5215.87,4424.7 6884.13,4425.35 4018.5,4426.14 5528.32,4433.6 3819.41,4438.93 5084.13,4439.48 2684.13,4440.64 5722,4440.98 2815.87,4445.04 4415.87,4445.04 3997.29,4447.36 4284.13,4450.16 7015.08,4452.44 5215.87,4454.7 5549.54,4454.82 6885.27,4455.33 3798.2,4460.14 5743.22,4462.19 3976.08,4468.57 5084.13,4469.48 2684.13,4470.64 2815.87,4475.04 4415.87,4475.04 5570.75,4476.03 4284.13,4480.16 3776.99,4481.36 7011.88,4482.27 5764.43,4483.4 5215.87,4484.7 6888.12,4485.2 3954.87,4489.78 5591.96,4497.24 5084.13,4499.48 2100,4500 2200,4500 2900,4500 3000,4500 3100,4500 3200,4500 3300,4500 3400,4500 3500,4500 3600,4500 3700,4500 4000,4500 4100,4500 4200,4500 4800,4500 4900,4500 5000,4500 5300,4500 5400,4500 5500,4500 5900,4500 6000,4500 6100,4500 6200,4500 6300,4500 6400,4500 6500,4500 6600,4500 6700,4500 6800,4500 7100,4500 7200,4500 7600,4500 7700,4500 7900,4500 2684.13,4500.64 3755.77,4502.57 2815.87,4505.04 4415.87,4505.04 5785.64,4504.62 4284.13,4510.16 3933.65,4510.99 5215.87,4514.7 5613.18,4518.45 3734.56,4523.78 5806.86,4525.83 5084.13,4529.47 2684.13,4530.64 3912.44,4532.21 2815.87,4535.04 4415.87,4535.04 4284.13,4540.16 5634.39,4539.67 3713.35,4545 5215.87,4544.7 5828.07,4547.04 3891.23,4553.42 5084.13,4559.47 2684.13,4560.64 5655.6,4560.88 2815.87,4565.04 4415.87,4565.04 3692.13,4566.21 5849.28,4568.26 4284.13,4570.16 3870.01,4574.63 5215.87,4574.7 5676.81,4582.09 3670.92,4587.42 5084.13,4589.47 5870.49,4589.47 2684.13,4590.64 2815.87,4595.04 4415.87,4595.04 7011.88,4595.29 3848.8,4595.85 2250,4600 2350,4600 2650,4600 2850,4600 2950,4600 3050,4600 3150,4600 3250,4600 3350,4600 3450,4600 3550,4600 3950,4600 4050,4600 4150,4600 4250,4600 4284.13,4600.16 4450,4600 4550,4600 4650,4600 4750,4600 4850,4600 4950,4600 5050,4600 5250,4600 5350,4600 5450,4600 5550,4600 5650,4600 5950,4600 6050,4600 6150,4600 6250,4600 6350,4600 6450,4600 6550,4600 6650,4600 6750,4600 6850,4600 7050,4600 7150,4600 7250,4600 7350,4600 7450,4600 7550,4600 7650,4600 7750,4600 7950,4600 8050,4600 6887.38,4600.86 5698.03,4603.31 5215.87,4604.7 3649.71,4608.63 5891.71,4610.68 3827.59,4617.06 5084.13,4619.47 2684.13,4620.64 2815.87,4625.04 4415.87,4625.04 5719.24,4624.52 7015.74,4625.04 3628.5,4629.85 4284.13,4630.16 6884.13,4630.69 5912.92,4631.89 5215.87,4634.69 3806.38,4638.27 5740.45,4645.73 5084.13,4649.47 2684.13,4650.64 3607.28,4651.06 5934.13,4653.11 2815.87,4655.04 4415.87,4655.04 7015.87,4655.04 3785.16,4659.48 4284.13,4660.16 6884.13,4660.69 5215.87,4664.69 5761.67,4666.94 3586.07,4672.27 5955.35,4674.32 5084.13,4679.47 2684.13,4680.64 3763.95,4680.7 2815.87,4685.04 4415.87,4685.04 7015.87,4685.04 5782.88,4688.16 4284.13,4690.16 6884.13,4690.69 3564.86,4693.49 5215.87,4694.69 5976.07,4696.01 2900,4700 3000,4700 3100,4700 3200,4700 3300,4700 3400,4700 3500,4700 3800,4700 3900,4700 4000,4700 4100,4700 4200,4700 4500,4700 4600,4700 4700,4700 4800,4700 4900,4700 5000,4700 5300,4700 5400,4700 5500,4700 5600,4700 5700,4700 6000,4700 6100,4700 6200,4700 6300,4700 6400,4700 6500,4700 6600,4700 6700,4700 6800,4700 7100,4700 7200,4700 7400,4700 7600,4700 7700,4700 7900,4700 3742.74,4701.91 5084.13,4709.47 5804.09,4709.37 2684.13,4710.64 2815.87,4715.03 3543.64,4714.7 4415.87,4715.03 7015.87,4715.03 4284.13,4720.16 5993.44,4720.47 6884.13,4720.69 3721.52,4723.12 5215.87,4724.69 5825.3,4730.58 3523,4736.47 5084.13,4739.47 2684.13,4740.64 3700.31,4744.34 2815.87,4745.03 4415.87,4745.03 7015.87,4745.03 6006.19,4747.62 4284.13,4750.16 6884.13,4750.69 5846.52,4751.79 3498.78,4754.17 5215.87,4754.69 3679.1,4765.55 5084.13,4769.47 2683.33,4770.63 5867.73,4773.01 2818.68,4774.9 4418.68,4774.9 6018.68,4774.9 7018.68,4774.9 3480.16,4777.69 4279.3,4779.77 6879.1,4780.26 5222.44,4783.97 3657.89,4786.76 5075.36,4798.16 2675.19,4799.5 2250,4800 2350,4800 2450,4800 2650,4800 2850,4800 3050,4800 3150,4800 3250,4800 3450,4800 3850,4800 3950,4800 4050,4800 4250,4800 4450,4800 4650,4800 4750,4800 4850,4800 5050,4800 5250,4800 5450,4800 5550,4800 5650,4800 5850,4800 6050,4800 6250,4800 6350,4800 6450,4800 6550,4800 6650,4800 6850,4800 7050,4800 7250,4800 7350,4800 7450,4800 7550,4800 7650,4800 7750,4800 7850,4800 8050,4800 5875.12,4802.08 2824.88,4804.25 4424.88,4804.25 6024.88,4804.25 7024.88,4804.25 3475.12,4807.26 3636.67,4807.98 4275.12,4809.47 6875.12,4810 5224.88,4813.86 5075.12,4828.16 2675.12,4829.5 5875.12,4832.08 2824.88,4834.25 4424.88,4834.25 6024.88,4834.25 7024.88,4834.25 3624.88,4835.56 3475.12,4837.26 4275.12,4839.47 6875.12,4839.99 5224.88,4843.86 5075.12,4858.16 2675.12,4859.5 5875.12,4862.08 2824.88,4864.25 4424.88,4864.25 6024.88,4864.25 7024.88,4864.25 3624.88,4865.56 3475.12,4867.26 4275.12,4869.47 6875.12,4869.99 5224.88,4873.86 5075.12,4888.16 2675.12,4889.5 5875.12,4892.08 2824.88,4894.25 4424.88,4894.25 6024.88,4894.25 7024.88,4894.25 3624.88,4895.56 3475.12,4897.26 4275.12,4899.47 2300,4900 2400,4900 2500,4900 3000,4900 3100,4900 3200,4900 3300,4900 3800,4900 3900,4900 4000,4900 4100,4900 4600,4900 4700,4900 4800,4900 4900,4900 5400,4900 5500,4900 5600,4900 5700,4900 6200,4900 6300,4900 6400,4900 6500,4900 6600,4900 6700,4900 6875.12,4899.99 7200,4900 7300,4900 7400,4900 7500,4900 7600,4900 7700,4900 7800,4900 5224.88,4903.86 5075.12,4918.16 2675.12,4919.5 5875.12,4922.08 2824.88,4924.25 4424.88,4924.25 6024.88,4924.25 7024.88,4924.25 3624.88,4925.56 3475.12,4927.26 4275.12,4929.47 6875.12,4929.99 5224.88,4933.86 5075.12,4948.16 2675.12,4949.5 5875.12,4952.08 2824.88,4954.25 4424.88,4954.25 6024.88,4954.25 7024.88,4954.25 3624.88,4955.56 3475.12,4957.26 4275.12,4959.47 6875.12,4959.99 5224.88,4963.86 5075.12,4978.16 2675.12,4979.5 5875.12,4982.08 2824.88,4984.25 4424.88,4984.25 6024.88,4984.25 7024.88,4984.25 3624.88,4985.56
  other v2: 2030,2300 2070,2300 2110,2300 2150,2300 2190,2300 2230,2300 2270,2300 2310,2300 2350,2300 2390,2300 2430,2300 2470,2300 2030,2340 2070,2340 2110,2340 2150,2340 2190,2340 2230,2340 2270,2340 2310,2340 2350,2340 2390,2340 2430,2340 2470,2340 2230,2380 2270,2380 2310,2380 2350,2380 2390,2380 2430,2380 2470,2380 2230,2420 2270,2420 2310,2420 2350,2420 2390,2420 2430,2420 2470,2420 2230,2460 2270,2460 2310,2460 2350,2460 2390,2460 2430,2460 2230,2500 2270,2500 2310,2500 2350,2500 2390,2500 2430,2500 2230,2700 2270,2700 2310,2700 2350,2700 2390,2700 2230,2740 2270,2740 2310,2740 2350,2740 2390,2740 2230,2780 2270,2780 2310,2780 2350,2780 2390,2780 2230,2820 2270,2820 2310,2820 2350,2820 2390,2820 2030,2860 2070,2860 2110,2860 2150,2860 2190,2860 2230,2860 2270,2860 2310,2860 2350,2860 2030,2900 2070,2900 2110,2900 2150,2900 2190,2900 2230,2900 2270,2900 2310,2900 2350,2900 2390,2900 2030,3200 2070,3200 2110,3200 2150,3200 2190,3200 2230,3200 2270,3200 2310,3200 2350,3200 2390,3200 2430,3200 2470,3200 2030,3240 2070,3240 2110,3240 2150,3240 2190,3240 2230,3240 2270,3240 2310,3240 2350,3240 2390,3240 2430,3240 2470,3240 2230,3280 2270,3280 2310,3280 2350,3280 2390,3280 2430,3280 2470,3280 2230,3320 2270,3320 2310,3320 2350,3320 2390,3320 2430,3320 2470,3320 2230,3360 2270,3360 2310,3360 2350,3360 2390,3360 2430,3360 2230,3400 2270,3400 2310,3400 2350,3400 2390,3400 2430,3400 2230,3600 2270,3600 2310,3600 2350,3600 2390,3600 2230,3640 2270,3640 2310,3640 2350,3640 2390,3640 2230,3680 2270,3680 2310,3680 2350,3680 2390,3680 2230,3720 2270,3720 2310,3720 2350,3720 2390,3720 2030,3760 2070,3760 2110,3760 2150,3760 2190,3760 2230,3760 2270,3760 2310,3760 2350,3760 2030,3800 2070,3800 2110,3800 2150,3800 2190,3800 2230,3800 2270,3800 2310,3800 2350,3800 2390,3800 2030,4100 2070,4100 2110,4100 2150,4100 2190,4100 2230,4100 2270,4100 2310,4100 2350,4100 2390,4100 2430,4100 2470,4100 2030,4140 2070,4140 2110,4140 2150,4140 2190,4140 2230,4140 2270,4140 2310,4140 2350,4140 2390,4140 2430,4140 2470,4140 2230,4180 2270,4180 2310,4180 2350,4180 2390,4180 2430,4180 2470,4180 2230,4220 2270,4220 2310,4220 2350,4220 2390,4220 2430,4220 2470,4220 2230,4260 2270,4260 2310,4260 2350,4260 2390,4260 2430,4260 2230,4300 2270,4300 2310,4300 2350,4300 2390,4300 2430,4300 2230,4500 2270,4500 2310,4500 2350,4500 2390,4500 2230,4540 2270,4540 2310,4540 2350,4540 2390,4540 2230,4580 2270,4580 2310,4580 2350,4580 2390,4580 2230,4620 2270,4620 2310,4620 2350,4620 2390,4620 2030,4660 2070,4660 2110,4660 2150,4660 2190,4660 2230,4660 2270,4660 2310,4660 2350,4660 2030,4700 2070,4700 2110,4700 2150,4700 2190,4700 2230,4700 2270,4700 2310,4700 2350,4700 2390,4700
  other v3: 4970,2493.5 4990,2493.5 5010,2493.5 5030,2493.5 4950,2513.5 4990,2513.5 5010,2513.5 5030,2513.5 4950,2533.5 4970,2533.5 5010,2533.5 5030,2533.5 4950,2553.5 4970,2553.5 4990,2553.5 5010,2553.5 5030,2553.5 4950,2573.5 4970,2573.5 4990,2573.5 5010,2573.5 5030,2573.5 7020,2830 7040,2830 7060,2830 7080,2830 7100,2830 7120,2830 7140,2830 7160,2830 7180,2830 7200,2830 7000,2850 7020,2850 7040,2850 7060,2850 7080,2850 7100,2850 7120,2850 7140,2850 7160,2850 7200,2850 7000,2870 7020,2870 7040,2870 7060,2870 7080,2870 7100,2870 7120,2870 7140,2870 7160,2870 7180,2870 7200,2870 7000,2890 7020,2890 7040,2890 7080,2890 7100,2890 7120,2890 7140,2890 7160,2890 7180,2890 7200,2890 7000,2910 7020,2910 7040,2910 7060,2910 7100,2910 7120,2910 7140,2910 7160,2910 7180,2910 7200,2910 7000,2930 7020,2930 7040,2930 7060,2930 7080,2930 7120,2930 7140,2930 7160,2930 7180,2930 7200,2930 7000,2950 7020,2950 7040,2950 7060,2950 7080,2950 7100,2950 7120,2950 7140,2950 7160,2950 7180,2950 7200,2950 7000,2970 7020,2970 7040,2970 7060,2970 7080,2970 7100,2970 7120,2970 7140,2970 7160,2970 7180,2970 7200,2970 7000,2990 7020,2990 7040,2990 7060,2990 7080,2990 7100,2990 7120,2990 7140,2990 7160,2990 7180,2990 7200,2990 7000,3010 7020,3010 7040,3010 7060,3010 7080,3010 7100,3010 7120,3010 7140,3010 7160,3010 7180,3010 7200,3010 7020,3030 7040,3030 7060,3030 7080,3030 7100,3030 7120,3030 7140,3030 7160,3030 7180,3030 4624.02,4081.89 4643.7,4081.89 4840.55,4081.89 4860.24,4081.89 4624.02,4101.57 4643.7,4101.57 4663.39,4101.57 4683.07,4101.57 4702.76,4101.57 4742.13,4101.57 4643.7,4121.26 4662.13,4140 4682.13,4140 4702.13,4140 4722.13,4140 4742.13,4140 4762.13,4140 4782.13,4140 4802.13,4140 4822.13,4140 4662.13,4160 4682.13,4160 4702.13,4160 4722.13,4160 4742.13,4160 4762.13,4160 4782.13,4160 4802.13,4160 4822.13,4160 4643.7,4160.63 4624.02,4180.31 4643.7,4180.31 4662.13,4180 4682.13,4180 4702.13,4180 4722.13,4180 4742.13,4180 4762.13,4180 4782.13,4180 4802.13,4180 4822.13,4180 4860.24,4180.31 4624.02,4200 4643.7,4200 4662.13,4200 4682.13,4200 4702.13,4200 4722.13,4200 4742.13,4200 4762.13,4200 4782.13,4200 4802.13,4200 4822.13,4200 4840.55,4200 4860.24,4200 4624.02,4219.69 4643.7,4219.69 4662.13,4220 4682.13,4220 4702.13,4220 4722.13,4220 4742.13,4220 4762.13,4220 4782.13,4220 4802.13,4220 4822.13,4220 4860.24,4219.69 4643.7,4239.37 4662.13,4240 4682.13,4240 4702.13,4240 4722.13,4240 4742.13,4240 4762.13,4240 4782.13,4240 4802.13,4240 4822.13,4240 4662.13,4260 4682.13,4260 4702.13,4260 4722.13,4260 4762.13,4260 4782.13,4260 4802.13,4260 4822.13,4260 4624.02,4318.11 4643.7,4318.11 4840.55,4318.11 4860.24,4318.11 6960,4515 6940,4535 6980,4535 6960,4555
  other v4: 6100,3141.89
  other v5: 2610,2020 2890,2020 4860,2020 5140,2020 6540,2020 6820,2020 2610,2070 2890,2070 4860,2070 5140,2070 6540,2070 6820,2070 2610,2120 2890,2120 4860,2120 5140,2120 6540,2120 6820,2120 2610,2170 2890,2170 4860,2170 5140,2170 6540,2170 6820,2170 2020,2460 2070,2460 2120,2460 2170,2460 2020,2740 2070,2740 2120,2740 2170,2740 2020,3360 2070,3360 2120,3360 2170,3360 2020,3640 2070,3640 2120,3640 2170,3640 2020,4260 2070,4260 2120,4260 2170,4260 2020,4540 2070,4540 2120,4540 2170,4540 2610,4830 2890,4830 3410,4830 3690,4830 4210,4830 4490,4830 5010,4830 5290,4830 5810,4830 6090,4830 6810,4830 7090,4830 2610,4880 2890,4880 3410,4880 3690,4880 4210,4880 4490,4880 5010,4880 5290,4880 5810,4880 6090,4880 6810,4880 7090,4880 2610,4930 2890,4930 3410,4930 3690,4930 4210,4930 4490,4930 5010,4930 5290,4930 5810,4930 6090,4930 6810,4930 7090,4930 2610,4980 2890,4980 3410,4980 3690,4980 4210,4980 4490,4980 5010,4980 5290,4980 5810,4980 6090,4980 6810,4980 7090,4980
  other v6: 5837,3367 5868,3367 5899,3367 5930,3367 5961,3367 5992,3367 6023,3367 5837,3398 5868,3398 5899,3398 5930,3398 5961,3398 5992,3398 6023,3398 5837,3429 5868,3429 5899,3429 5930,3429 5961,3429 5992,3429 6023,3429 5837,3460 5868,3460 5899,3460 5961,3460 5992,3460 6023,3460 5837,3491 5868,3491 5899,3491 5930,3491 5961,3491 5992,3491 6023,3491 5837,3522 5868,3522 5899,3522 5930,3522 5961,3522 5992,3522 6023,3522 5868,3553 5899,3553 5930,3553 5961,3553 5992,3553 6023,3553
  other v7: 2150,2150 7950,2150 2150,4850 7950,4850
IF_I_6_N: C72.1 C73.2 U8.45 | length 524.9
  Signal Layer 1 w10: C73.2@6686.42,3360 6731.65,3360 6742.91,3371.26 6791.94,3371.26 7050.79,3112.41 U8.45@7050.79,3063.76
IF_I_6_P: C71.2 C72.2 U8.44 | length 570.1
  Signal Layer 1 w10: C71.2@6686.42,3440 6731.65,3440 6742.91,3428.74 C72.2@6750,3428.74 6757.09,3428.74 7070.47,3115.35 U8.44@7070.47,3063.76
IF_I_EXT_N: C73.1 R11.1 U7.5 | length 1636.2
  Signal Layer 1 w10: R11.1@5968.24,3697.72 v4(5968.24,3740) ; v4(6560,3379.19) 6599.88,3379.19 6613.58,3365.49 C73.1@6613.58,3360 ; v4(7020,3350) 7045.78,3350 7130,3434.22 U7.5@7130,3543.7
  Signal Layer 4 w10: v4(5968.24,3740) 6220,3740 6377.66,3582.34 6377.66,3496.89 6483.03,3391.51 6549.14,3391.51 6560,3380.66 v4(6560,3379.19) 6572.81,3392 6848.5,3392 6884.86,3355.64 7011.65,3355.64 7017.29,3350 v4(7020,3350)
IF_I_EXT_P: C71.1 R12.1 U7.3 | length 1526.3
  Signal Layer 1 w10: R12.1@6009.87,3697.72 6009.93,3697.78 6009.93,3759.93 v4(6010,3760) ; v4(6560,3420.81) 6599.88,3420.81 6613.58,3434.51 C71.1@6613.58,3440 ; v4(7016.11,3377.31) 7016.11,3380.01 7030,3393.9 U7.3@7030,3543.7
  Signal Layer 4 w10: v4(6010,3760) 6228.28,3760 6397.66,3590.63 6397.66,3505.17 6491.31,3411.51 6548,3411.51 6557.29,3420.81 v4(6560,3420.81) 6572.81,3408 6855.13,3408 6891.49,3371.64 7007.74,3371.64 7013.41,3377.31 v4(7016.11,3377.31)
IF_Q_6_N: C75.1 C76.2 U8.47 | length 419.6
  Signal Layer 1 w10: C76.2@6686.42,3200 6731.65,3200 6742.91,3211.26 6757.09,3211.26 6764.29,3218.46 6764.29,3224.3 6770.15,3230.16 6889.07,3230.16 7011.42,3107.81 7011.42,3079.8
IF_Q_6_P: C74.2 C75.2 U8.46 | length 466.1
  Signal Layer 1 w10: C74.2@6686.42,3280 6731.65,3280 6742.91,3268.74 6757.09,3268.74 6764.29,3261.54 6764.29,3255.7 6770.15,3249.84 6893.56,3249.84 7031.1,3112.3 U8.46@7031.1,3063.76
IF_Q_EXT_N: C76.1 R13.1 U7.10 | length 1559.9
  Signal Layer 1 w10: R13.1@6077.72,3219.19 v4(6560,3219.19) 6599.88,3219.19 6613.58,3205.49 C76.1@6613.58,3200 ; v4(7110.8,3690.8) 7128.08,3708.08 7128.08,3754.38 U7.10@7130,3756.3
  Signal Layer 4 w10: v4(6560,3219.19) 6572.81,3232 6982,3232 7106,3356 7106,3639.55 7106.42,3639.97 7106.42,3679.94 7108.88,3682.4 7108.88,3688.88 v4(7110.8,3690.8)
IF_Q_EXT_P: C74.1 R14.1 U7.12 | length 1552.9
  Signal Layer 1 w10: R14.1@6077.72,3260.81 v4(6560,3260.81) 6599.88,3260.81 6613.58,3274.51 C74.1@6613.58,3280 ; U7.12@7030,3756.3 7030,3737.6 7036.81,3730.79 7043.93,3730.79 v4(7086.04,3688.69)
  Signal Layer 4 w10: v4(6560,3260.81) 6572.81,3248 6975.37,3248 7090,3362.63 7090,3646.18 7090.42,3646.6 7090.42,3677.83 7087.95,3680.29 7087.95,3686.77 v4(7086.04,3688.69)
LNA_OUT: C17.2 U4.10 | length 1344.8
  Signal Layer 1 w16.65: C17.2@6178.11,3470 6238.58,3470 ccw(c6238.58,3570) 6309.29,3499.29 6920.71,4110.71 ccw(c6850,4181.42) 6950,4181.42 6950,4443.98
LO_BEAMFORMER: U1.A7 U3.12 | length 1571.4
  Signal Layer 1 w16.65: 4742.13,4050 4742.13,2643.5 ccw(c4842.13,2643.5) 4842.13,2543.5 4849.98,2543.5
LO_MIXER: U3.29 U6.2 | length 971.3
  Signal Layer 1 w16.65: 5130.02,2543.5 5572.08,2543.5 ccw(c5572.08,2643.5) 5642.79,2572.79 5881.03,2811.03 ccw(c5810.31,2881.74) 5910.31,2881.74 5910.31,2916.98
MCU_RESET_9: J22.11 SW1.1 SW1.2 | length 2201.2
  Signal Layer 1 w10: J22.11@3160,3220 3220,3160 3220,2360 3420,2160 4171.18,2160 4217.01,2205.83 SW1.1@4217.01,2216.65 SW1.2@4217.01,2423.35
MIXER_CS: J21.7 R10.1 U5.26 | length 2802.6
  Signal Layer 1 w10: R10.1@5710,3172.28 5711.14,3171.14 5748.86,3171.14 v4(5750,3170) ; U5.26@6067,3371.42 6085.68,3371.42 v4(6105.06,3352.03)
  Signal Layer 4 w10: J21.7@3860,2820 3815.57,2864.43 3815.57,3139.71 3845.86,3170 v4(5750,3170) 5874.38,3170 6056.42,3352.03 v4(6105.06,3352.03)
MIXER_EN: J21.11 R9.1 U5.1 | length 3224.9
  Signal Layer 1 w10: v4(5560.56,2720) 5560,2720.56 5560,3402.28 R9.1@5730,3572.28 5734.02,3568.27 U5.1@5793,3568.27
  Signal Layer 4 w10: J21.11@3860,3220 3801.57,3161.57 3801.57,2798.43 3827.89,2772.11 3880.99,2772.11 3933.1,2720 v4(5560.56,2720)
MIXER_MUXOUT: J22.20 U5.11 | length 2943.1
  Signal Layer 1 w10: v4(5738.06,3385.91) 5740.77,3385.91 5755.27,3371.42 U5.11@5793,3371.42
  Signal Layer 4 w10: J22.20@3160,4120 3810,3470 3881.63,3470 3965.72,3385.91 v4(5738.06,3385.91)
NetC1_2: C1.2 U1.N10 | length 85.1
  Signal Layer 1 w8: C1.2@4640,4381.26 4647.09,4381.26 4655.29,4373.06 4655.29,4362.89 4683.07,4335.11 U1.N10@4683.07,4318.11
NetC2_2: C2.2 U1.N9 | length 64.3
  Signal Layer 1 w8: C2.2@4700,4381.26 4700,4337.87 4702.76,4335.11 U1.N9@4702.76,4318.11
NetC3_2: C3.2 U1.M9 | length 133
  Signal Layer 4 w8: v3(4702.76,4298.43) 4702.76,4298.97 4697.44,4304.28 4697.44,4356.26 4722.44,4381.26 v3(4760,4381.26)
NetC4_2: C4.2 U1.M8 | length 181.2
  Signal Layer 4 w8: v3(4722.44,4298.43) 4709.44,4311.43 4709.44,4351.29 4726.41,4368.26 4780.54,4368.26 4793.54,4381.26 v3(4820,4381.26)
NetC17_1: C17.1 U5.31 | length 32.9
  Signal Layer 1 w16.65: 6109.02,3469.84 6109.18,3470 C17.1@6141.89,3470
NetC23_1: C23.1 U5.17 | length 77.4
  Signal Layer 1 w16.65: C23.1@5880.31,3208.11 5880.31,3216.62 cw(c5913.38,3216.62) 5890,3240 ccw(c5872.74,3257.26) 5897.15,3257.26 5897.15,3280.98
NetC23_2: C23.2 U6.9 | length 77.7
  Signal Layer 1 w16.65: C23.2@5880.31,3171.89 5880.31,3117.19 ccw(c5897.01,3117.19) 5885.21,3105.38 cw(c5880.9,3101.08) 5886.99,3101.08 5886.99,3096.02
NetC24_1: C24.1 U5.18 | length 77.4
  Signal Layer 1 w16.65: 5923.48,3280.98 5923.48,3257.26 ccw(c5947.89,3257.26) 5930.63,3240 cw(c5907.25,3216.62) 5940.31,3216.62 C24.1@5940.31,3208.11
NetC24_2: C24.2 U6.7 | length 77.7
  Signal Layer 1 w16.65: 5933.64,3096.02 5933.64,3101.08 cw(c5939.73,3101.08) 5935.42,3105.38 ccw(c5923.62,3117.19) 5940.32,3117.19 C24.2@5940.31,3171.89
NetC25_2: C25.2 U5.45 | length 80.5
  Signal Layer 1 w10: U5.45@5880.79,3597 5880.79,3639.13 5902.91,3661.26 C25.2@5910,3661.26
NetC50_2: C50.2 U8.10 | length 71.8
  Signal Layer 1 w10: C50.2@6898.11,2870 6907.01,2861.1 U8.10@6966.24,2861.1
NetC51_2: C51.2 U8.11 | length 74.2
  Signal Layer 1 w10: C51.2@6898.11,2826.8 6912.72,2841.42 U8.11@6966.24,2841.42
NetC59_2: C59.2 C61.2 U8.8 | length 135.8
  Signal Layer 1 w10: C59.2@6840,2923.58 6841.69,2921.89 C61.2@6900,2921.89 6921.42,2900.47 U8.8@6966.24,2900.47
NetC67_1: C67.1 R33.2 | length 44.3
  Signal Layer 1 w10: R33.2@6913.97,2695.35 6916.29,2697.68 6954.05,2697.68 C67.1@6956.38,2700
NetC67_2: C67.2 C70.2 U8.14 | length 147.2
  Signal Layer 1 w10: C70.2@6992.6,2656.8 C67.2@6992.6,2700 6992.6,2737.04 7011.42,2755.86 U8.14@7011.42,2796.24
NetD1_1: D1.1 J16.1 U10.3
NetD2_1: D2.1 J19.1 U11.3
NetD3_2: D3.2 R38.2 | length 69.3
  Signal Layer 1 w15: D3.2@2401.34,4660 2402.8,4658.54 R38.2@2470,4658.54
NetD4_2: D4.2 R39.2 | length 69.3
  Signal Layer 1 w15: D4.2@2401.34,2860 2402.8,2858.54 R39.2@2470,2858.54
NetD5_2: D5.2 R40.2 | length 69.3
  Signal Layer 1 w15: D5.2@2401.34,3760 2402.8,3758.54 R40.2@2470,3758.54
NetD6_1: D6.1 J20.1 U12.3
NetJ6_1: J6.1 J7.1 | length 2800
  Signal Layer 1 w16.65: J6.1@2750,2100 J7.1@2750,4900
NetJ10_1: J10.1 R15.2 U7.1 | length 1032
  Signal Layer 1 w10: R15.2@6921.46,3470 6921.46,3476.89 6930,3485.43 U7.1@6930,3543.7 6930,3562.4 6975.16,3607.57 7047.56,3607.57 7090,3650 7280.2,3650 7400,3769.8 J10.1@7400,4150
NetJ11_1: J11.1 R16.2 U7.14 | length 1031.9
  Signal Layer 1 w10: U7.14@6930,3756.3 6930,3814.57 6921.46,3823.11 6921.46,3836.89 6901.63,3856.72 6901.63,3957.49 7400,4455.86 J11.1@7400,4570
NetJ12_1: J12.1 R21.2 U7.7 | length 1075.5
  Signal Layer 1 w10: R21.2@7238.54,3470 7238.54,3476.89 7230,3485.43 U7.7@7230,3543.7 7233.35,3547.06 7233.35,3583.35 7620,3970 7829.42,3970 7880,4020.58 J12.1@7880,4150
NetJ13_1: J13.1 R22.2 U7.8 | length 1379.5
  Signal Layer 1 w10: U7.8@7230,3756.3 7230,3814.57 7238.54,3823.11 R22.2@7238.54,3830 7238.54,3836.89 7258.37,3856.72 7258.37,3989.17 7230,4017.54 7230,4266.06 7343.94,4380 7810,4380 7880,4450 J13.1@7880,4570
NetJ15_1: J15.1 R35.1 | length 610.6
  Signal Layer 1 w16.65: J15.1@6680,2100 6680,2268.58 cw(c6780,2268.58) 6709.29,2339.29 6830,2460 cw(c6896.91,2393.09) 6896.91,2487.72 R35.1@7015.35,2487.72
NetR1_2: R1.2 U1.C13 | length 71
  Signal Layer 1 w10: R1.2@4557.72,4110 4564.53,4116.81 4605.67,4116.81 4610.12,4121.26 U1.C13@4624.02,4121.26